# Altium PCB POWER_SUPPLY.PcbDoc (part 3 of 5)
Units mm, origin at the board's own origin, x right, y up, seen from the top; angles counter-clockwise.
Board outline 115 x 115 mm, 2 copper layers (Top Layer, Bottom Layer), stack 1.58 mm thick; 91 components, 48 nets, 207 pads, 26 vias.
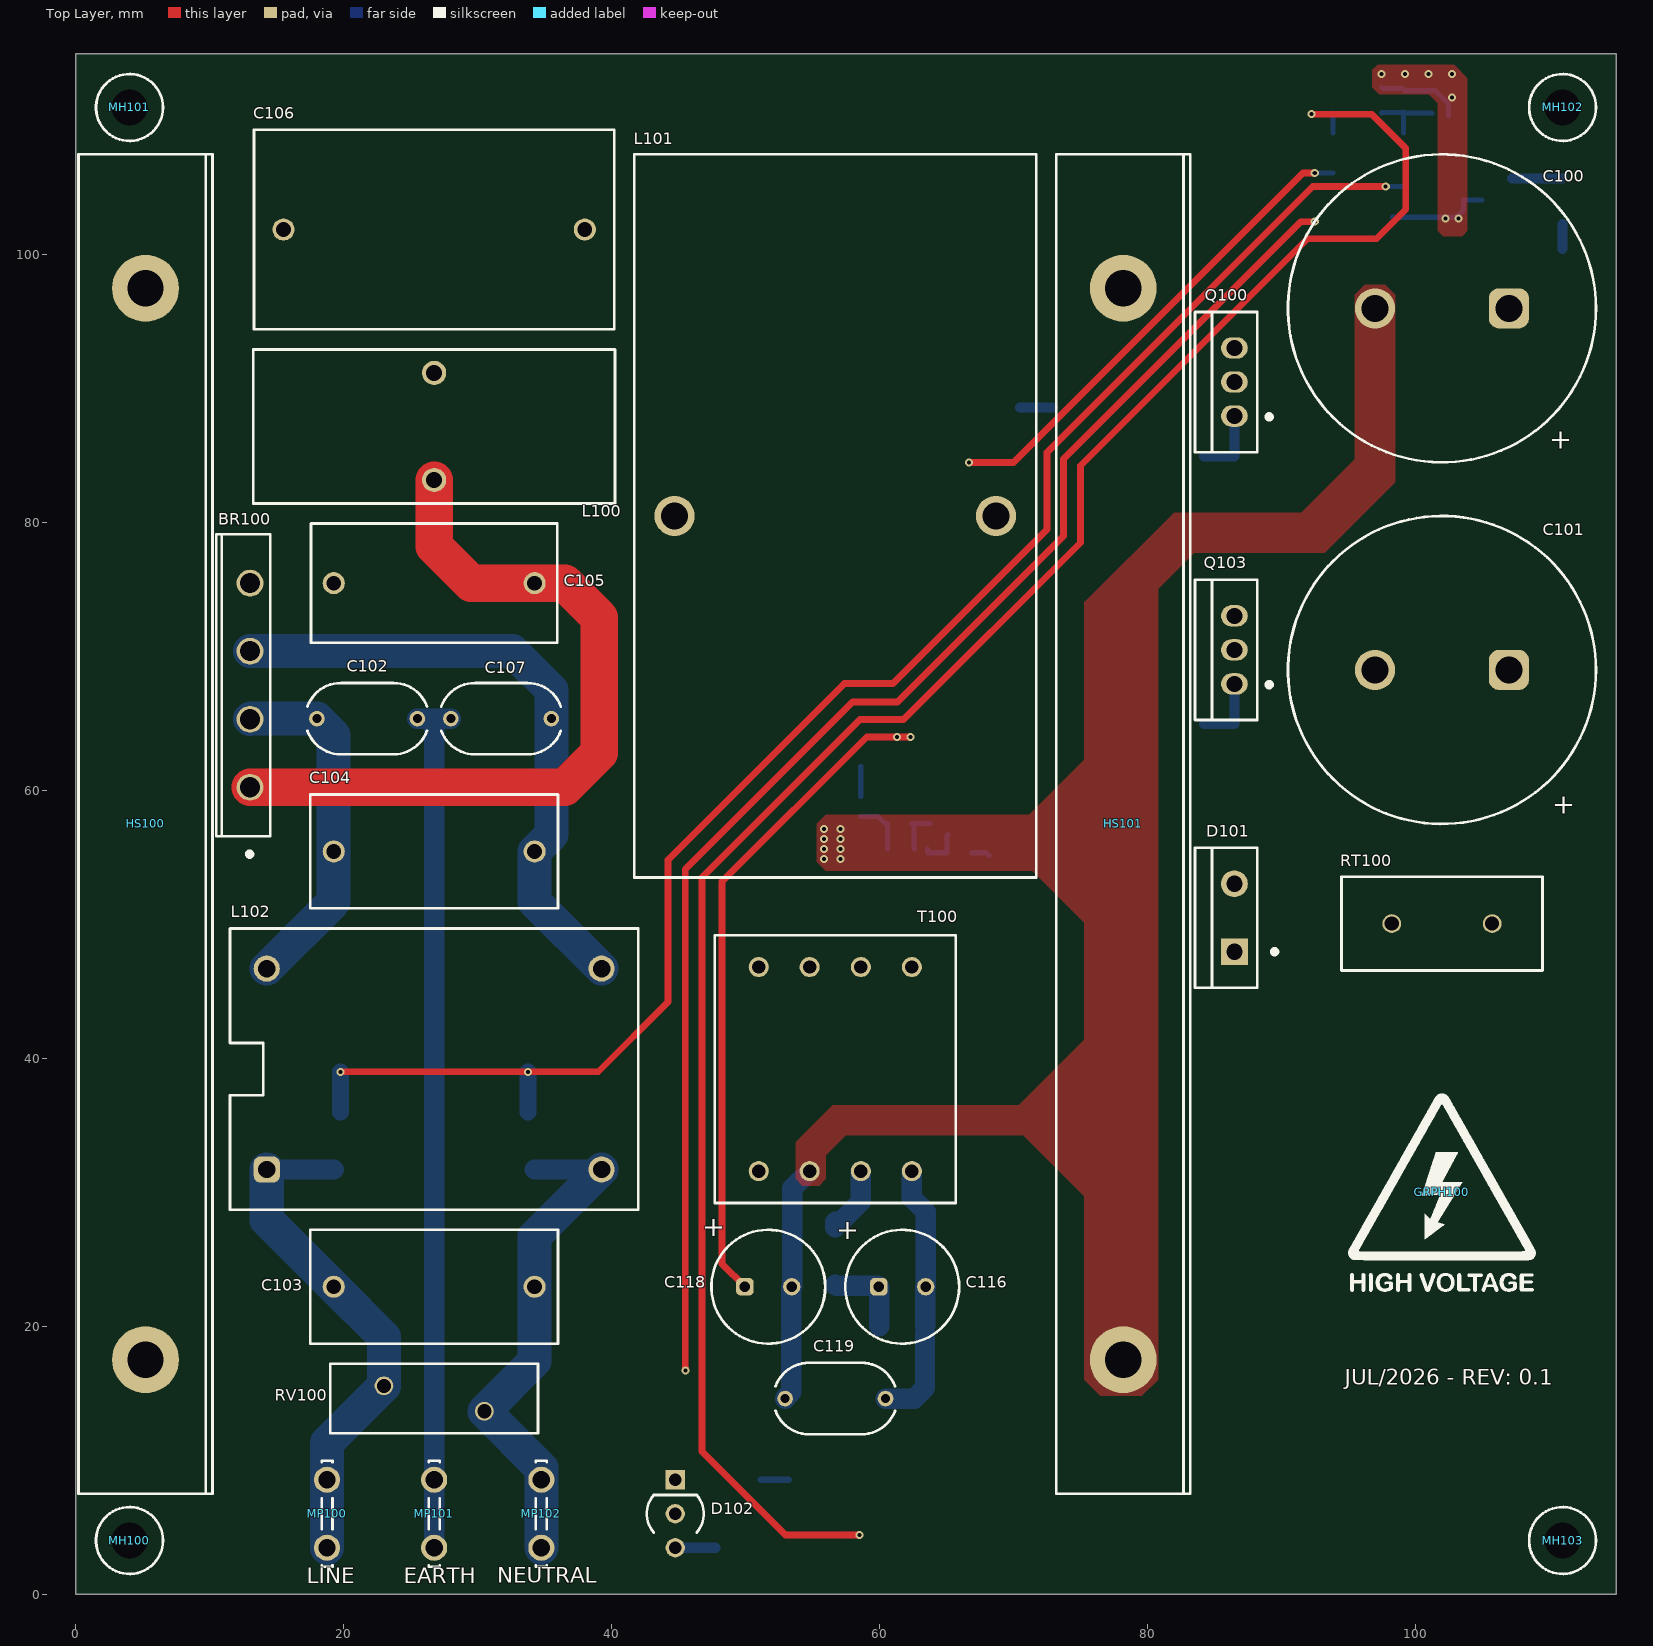
[diagram p0: Top Layer view]

## Part data (continued)
R100 R101 R102: library part RL2512FK-070R18L, "RES 0.18 OHM 1% 1W 2512", Case Code (Imperial)=2512, Case Code (Metric)=6332, Manufacturer="Yageo Group", Max Operating Temperature=155°C, Min Operating Temperature=-55°C, Power Rating=1W, Ratings=AEC-Q200, Supplier Part Number=311-0.18TCT-ND, Temperature Coefficient=600ppm/°C, Tolerance=1%, Working Voltage=424.3mV, Case/Package=2512, Category="Chip SMD Resistors", China RoHS=Non-Compliant, ComponentLink1Description=https://datasheet.octopart.com:443/RL2512FK-070R18L-Yageo-datasheet-182189623.pdf?src-supplier=Newark, ComponentLink1URL=https://datasheet.octopart.com:443/RL2512FK-070R18L-Yageo-datasheet-182189623.pdf?src-supplier=Newark, ComponentLink2Description=https://datasheet.octopart.com:443/RL2512FK-070R18L-Yageo-datasheet-8324393.pdf?src-supplier=Newark, ComponentLink2URL=https://datasheet.octopart.com:443/RL2512FK-070R18L-Yageo-datasheet-8324393.pdf?src-supplier=Newark, ComponentLink3Description=https://datasheet.octopart.com:443/RL2512FK-070R18L-Yageo-datasheet-62330055.pdf?src-supplier=element14+APAC, ComponentLink3URL=https://datasheet.octopart.com:443/RL2512FK-070R18L-Yageo-datasheet-62330055.pdf?src-supplier=element14+APAC, ComponentLink4Description=https://datasheet.octopart.com/RL2512FK-070R18L-Yageo-datasheet-10916029.pdf, ComponentLink4URL=https://datasheet.octopart.com/RL2512FK-070R18L-Yageo-datasheet-10916029.pdf, ComponentLink5Description=https://datasheet.octopart.com:443/RL2512FK-070R18L-Yageo-datasheet-178203169.pdf?src-supplier=Future+Electronics, ComponentLink5URL=https://datasheet.octopart.com:443/RL2512FK-070R18L-Yageo-datasheet-178203169.pdf?src-supplier=Future+Electronics, ComponentLink6Description=https://datasheet.octopart.com:443/RL2512FK-070R18L-Yageo-datasheet-83209227.pdf?src-supplier=Future+Electronics, ComponentLink6URL=https://datasheet.octopart.com:443/RL2512FK-070R18L-Yageo-datasheet-83209227.pdf?src-supplier=Future+Electronics, ComponentLink7Description=https://datasheet.octopart.com:443/RL2512FK-070R18L-Yageo-datasheet-137700928.pdf?src-supplier=Future+Electronics, ComponentLink7URL=https://datasheet.octopart.com:443/RL2512FK-070R18L-Yageo-datasheet-137700928.pdf?src-supplier=Future+Electronics, ComponentLink8Description=https://datasheet.octopart.com:443/RL2512FK-070R18L-Yageo-datasheet-62044473.pdf?src-supplier=Future+Electronics, ComponentLink8URL=https://datasheet.octopart.com:443/RL2512FK-070R18L-Yageo-datasheet-62044473.pdf?src-supplier=Future+Electronics, ComponentLink9Description=https://datasheet.octopart.com:443/RL2512FK-070R18L-Yageo-datasheet-61253474.pdf?src-supplier=Future+Electronics, ComponentLink9URL=https://datasheet.octopart.com:443/RL2512FK-070R18L-Yageo-datasheet-61253474.pdf?src-supplier=Future+Electronics, ComponentLink10Description=https://datasheet.octopart.com:443/RL2512FK-070R18L-Yageo-datasheet-60483056.pdf?src-supplier=Future+Electronics, ComponentLink10URL=https://datasheet.octopart.com:443/RL2512FK-070R18L-Yageo-datasheet-60483056.pdf?src-supplier=Future+Electronics, ComponentLink11Description=http://sigma.octopart.com:80/conflict_mineral_statement/Yageo-company-3.pdf?src-supplier=Compliance+Statements, ComponentLink11URL=http://sigma.octopart.com:80/conflict_mineral_statement/Yageo-company-3.pdf?src-supplier=Compliance+Statements, ComponentLink12Description=http://sigma.octopart.com:80/rohs_statement/Yageo-company-2.pdf?src-supplier=Compliance+Statements, ComponentLink12URL=http://sigma.octopart.com:80/rohs_statement/Yageo-company-2.pdf?src-supplier=Compliance+Statements, Composition="Thick Film", Contact Plating=Tin, Depth=3.2mm, Height=550µm, Lead Free="Lead Free", Length=6.35mm, Lifecycle Status=Production, Manufacturer Part Number=RL2512FK-070R18L, Military Standard=Not, Mounting Technology="Surface Mount", Number of Terminals=2, Packaging="Cut Tape", Pricing="1=0.44, 10=0.249, 25=0.206, 50=0.1814, 100=0.1618, 250=0.142, 500=0.13056, 1000=0.12148 (USD)", Radiation Hardening=No, REACH SVHC=Yes, RoHS=Compliant, Schedule B="8533210045, 8533210045|8533210045, 8533210045|8533210045|8533210045, 8533210045|8533210045|8533210045|8533210045", Stock=7929, Supplier=DigiKey, Termination=SMD/SMT, Weight=40.511469mg, Width=3.2mm
R103 R111: library part RC0805FR-073R92L, "RES 3.92 OHM 1% 1/8W 0805", Case Code (Imperial)=0805, Manufacturer="Yageo Group", Manufacturer Package Identifier="0805 (2012 metric)", Max Operating Temperature=155°C, Max Power Dissipation=125mW, Min Operating Temperature=-55°C, Supplier Part Number=311-3.92CRCT-ND, Temperature Coefficient=200ppm/°C, Tolerance=1%, Voltage Rating=150V, Case/Package=0805, Category="Chip SMD Resistors", China RoHS=Non-Compliant, ComponentLink1Description=https://datasheet.octopart.com:443/RC0805FR-073R92L-Yageo-datasheet-175887523.pdf?src-supplier=IHS, ComponentLink1URL=https://datasheet.octopart.com:443/RC0805FR-073R92L-Yageo-datasheet-175887523.pdf?src-supplier=IHS, ComponentLink2Description=https://datasheet.octopart.com:443/RC0805FR-073R92L-Yageo-datasheet-103092701.pdf?src-supplier=Upverter, ComponentLink2URL=https://datasheet.octopart.com:443/RC0805FR-073R92L-Yageo-datasheet-103092701.pdf?src-supplier=Upverter, ComponentLink3Description=https://datasheet.octopart.com:443/RC0805FR-073R92L-Yageo-Group-datasheet-176638170.pdf?src-supplier=Future+Electronics, ComponentLink3URL=https://datasheet.octopart.com:443/RC0805FR-073R92L-Yageo-Group-datasheet-176638170.pdf?src-supplier=Future+Electronics, ComponentLink4Description=https://datasheet.octopart.com:443/RC0805FR-073R92L-Yageo-datasheet-164759695.pdf?src-supplier=Future+Electronics, ComponentLink4URL=https://datasheet.octopart.com:443/RC0805FR-073R92L-Yageo-datasheet-164759695.pdf?src-supplier=Future+Electronics, ComponentLink5Description=https://datasheet.octopart.com:443/RC0805FR-073R92L-Yageo-datasheet-12592811.pdf?src-supplier=Future+Electronics, ComponentLink5URL=https://datasheet.octopart.com:443/RC0805FR-073R92L-Yageo-datasheet-12592811.pdf?src-supplier=Future+Electronics, ComponentLink6Description=https://datasheet.octopart.com:443/RC0805FR-073R92L-Yageo-datasheet-8330313.pdf?src-supplier=Future+Electronics, ComponentLink6URL=https://datasheet.octopart.com:443/RC0805FR-073R92L-Yageo-datasheet-8330313.pdf?src-supplier=Future+Electronics, ComponentLink7Description=https://datasheet.octopart.com:443/RC0805FR-073R92L-Yageo-datasheet-8324252.pdf?src-supplier=Future+Electronics, ComponentLink7URL=https://datasheet.octopart.com:443/RC0805FR-073R92L-Yageo-datasheet-8324252.pdf?src-supplier=Future+Electronics, ComponentLink8Description=https://datasheet.octopart.com/RC0805FR-073R92L-Yageo-datasheet-73766026.pdf, ComponentLink8URL=https://datasheet.octopart.com/RC0805FR-073R92L-Yageo-datasheet-73766026.pdf, ComponentLink9Description=https://datasheet.octopart.com:443/RC0805FR-073R92L-Yageo-datasheet-118657.pdf?src-supplier=DigiKey, ComponentLink9URL=https://datasheet.octopart.com:443/RC0805FR-073R92L-Yageo-datasheet-118657.pdf?src-supplier=DigiKey, ComponentLink10Description=http://sigma.octopart.com:80/conflict_mineral_statement/Yageo-company-3.pdf?src-supplier=Compliance+Statements, ComponentLink10URL=http://sigma.octopart.com:80/conflict_mineral_statement/Yageo-company-3.pdf?src-supplier=Compliance+Statements, ComponentLink11Description=http://sigma.octopart.com:80/rohs_statement/Yageo-company-2.pdf?src-supplier=Compliance+Statements, ComponentLink11URL=http://sigma.octopart.com:80/rohs_statement/Yageo-company-2.pdf?src-supplier=Compliance+Statements, Composition="Thick Film", Contact Plating=Tin, Depth=1.25mm, Features="Moisture Resistant", Height=500µm, Lead Free="Lead Free", Length=2mm, Lifecycle Status=Production, Manufacturer Part Number=RC0805FR-073R92L, Military Standard=Not, Mounting Technology="Surface Mount", Number of Terminals=2, Number of Terminations=2, Power Dissipation=125mW, Power Rating=125mW, Pricing="1=0.1, 10=0.015, 25=0.0148 (USD)", Radiation Hardening=No, REACH SVHC=Yes, RoHS=Compliant, Schedule B="8533210045, 8533210045|8533210045|8533210045|8533210045|8533210045", Stock=8839, Supplier=DigiKey, Termination=SMD/SMT, Voltage Rating (DC)=150V, Width=1.25mm, Working Voltage=150V
R104 R105: library part RC1206FR-071K33L, "RES 1.33K OHM 1% 1/4W 1206", Case Code (Imperial)=1206, Case Code (Metric)=3216, Manufacturer="Yageo Group", Max Operating Temperature=155°C, Min Operating Temperature=-55°C, Power Rating=250mW, Supplier Part Number=311-1.33KFRCT-ND, Temperature Coefficient=100ppm/°C, Tolerance=1%, Voltage Rating=200V, Case/Package=1206, Category="Chip SMD Resistors", China RoHS=Non-Compliant, ComponentLink1Description=https://datasheet.octopart.com:443/RC1206FR-071K33L-Yageo-datasheet-175887523.pdf?src-supplier=IHS, ComponentLink1URL=https://datasheet.octopart.com:443/RC1206FR-071K33L-Yageo-datasheet-175887523.pdf?src-supplier=IHS, ComponentLink2Description=https://datasheet.octopart.com:443/RC1206FR-071K33L-Yageo-datasheet-103092701.pdf?src-supplier=Upverter, ComponentLink2URL=https://datasheet.octopart.com:443/RC1206FR-071K33L-Yageo-datasheet-103092701.pdf?src-supplier=Upverter, ComponentLink3Description=https://datasheet.octopart.com:443/RC1206FR-071K33L-Yageo-datasheet-176638170.pdf?src-supplier=Future+Electronics, ComponentLink3URL=https://datasheet.octopart.com:443/RC1206FR-071K33L-Yageo-datasheet-176638170.pdf?src-supplier=Future+Electronics, ComponentLink4Description=https://datasheet.octopart.com:443/RC1206FR-071K33L-Yageo-datasheet-8359522.pdf?src-supplier=Future+Electronics, ComponentLink4URL=https://datasheet.octopart.com:443/RC1206FR-071K33L-Yageo-datasheet-8359522.pdf?src-supplier=Future+Electronics, ComponentLink5Description=https://datasheet.octopart.com:443/RC1206FR-071K33L-Yageo-datasheet-164759695.pdf?src-supplier=Future+Electronics, ComponentLink5URL=https://datasheet.octopart.com:443/RC1206FR-071K33L-Yageo-datasheet-164759695.pdf?src-supplier=Future+Electronics, ComponentLink6Description=https://datasheet.octopart.com:443/RC1206FR-071K33L-Yageo-datasheet-137700087.pdf?src-supplier=Future+Electronics, ComponentLink6URL=https://datasheet.octopart.com:443/RC1206FR-071K33L-Yageo-datasheet-137700087.pdf?src-supplier=Future+Electronics, ComponentLink7Description=https://datasheet.octopart.com:443/RC1206FR-071K33L-Yageo-datasheet-27233761.pdf?src-supplier=Future+Electronics, ComponentLink7URL=https://datasheet.octopart.com:443/RC1206FR-071K33L-Yageo-datasheet-27233761.pdf?src-supplier=Future+Electronics, ComponentLink8Description=https://datasheet.octopart.com:443/RC1206FR-071K33L-Yageo-datasheet-13032847.pdf?src-supplier=Future+Electronics, ComponentLink8URL=https://datasheet.octopart.com:443/RC1206FR-071K33L-Yageo-datasheet-13032847.pdf?src-supplier=Future+Electronics, ComponentLink9Description=https://datasheet.octopart.com/RC1206FR-071K33L-Yageo-datasheet-73766026.pdf, ComponentLink9URL=https://datasheet.octopart.com/RC1206FR-071K33L-Yageo-datasheet-73766026.pdf, ComponentLink10Description=https://datasheet.octopart.com:443/RC1206FR-071K33L-Yageo-datasheet-118639.pdf?src-supplier=DigiKey, ComponentLink10URL=https://datasheet.octopart.com:443/RC1206FR-071K33L-Yageo-datasheet-118639.pdf?src-supplier=DigiKey, ComponentLink11Description=http://sigma.octopart.com:80/conflict_mineral_statement/Yageo-company-3.pdf?src-supplier=Compliance+Statements, ComponentLink11URL=http://sigma.octopart.com:80/conflict_mineral_statement/Yageo-company-3.pdf?src-supplier=Compliance+Statements, ComponentLink12Description=http://sigma.octopart.com:80/rohs_statement/Yageo-company-2.pdf?src-supplier=Compliance+Statements, ComponentLink12URL=http://sigma.octopart.com:80/rohs_statement/Yageo-company-2.pdf?src-supplier=Compliance+Statements, Composition="Thick Film", Country of Origin="Mainland China, Taiwan", Depth=1.6mm, Export Control Classification Number (ECCN) Code=EAR99, Harmonized Tariff Schedule (HTS) Code=8533.21.00.30, Height=550µm, Introduction Date=2004-09-22, Lead Free="Lead Free", Length=3.1mm, Lifecycle Status=Production, Manufacturer Part Number=RC1206FR-071K33L, Military Standard=Not, Mounting Technology="Surface Mount", Number of Terminals=2, Packaging="Tape & Reel", Pricing="1=0.1, 10=0.047, 25=0.036, 50=0.0296, 100=0.0247, 250=0.0198, 500=0.01698, 1000=0.01477 (USD)", REACH SVHC=Yes, RoHS=Compliant, Schedule B="8533210045, 8533210045|8533210045, 8533210045|8533210045|8533210045, 8533210045|8533210045|8533210045|8533210045", Stock=40191, Supplier=DigiKey, Termination=SMD/SMT, Voltage Rating (DC)=200V, Width=1.6mm, Working Voltage=200V
R106 R112: library part RC0805FR-0715RL, "RES 15 OHM 1% 1/8W 0805", Case Code (Imperial)=0805, Manufacturer="Yageo Group", Max Operating Temperature=155°C, Max Power Dissipation=125mW, Min Operating Temperature=-55°C, Supplier Part Number=311-15.0CRCT-ND, Temperature Coefficient=100ppm/°C, Tolerance=1%, Voltage Rating=150V, Case/Package=0805, Category="Chip SMD Resistors", China RoHS=Non-Compliant, ComponentLink1Description=https://datasheet.octopart.com:443/RC0805FR-0715RL-Yageo-datasheet-175887523.pdf?src-supplier=Newark, ComponentLink1URL=https://datasheet.octopart.com:443/RC0805FR-0715RL-Yageo-datasheet-175887523.pdf?src-supplier=Newark, ComponentLink2Description=https://datasheet.octopart.com:443/RC0805FR-0715RL-Yageo-datasheet-103092701.pdf?src-supplier=Upverter, ComponentLink2URL=https://datasheet.octopart.com:443/RC0805FR-0715RL-Yageo-datasheet-103092701.pdf?src-supplier=Upverter, ComponentLink3Description=https://datasheet.octopart.com:443/RC0805FR-0715RL-Yageo-Group-datasheet-190305687.pdf?src-supplier=Future+Electronics, ComponentLink3URL=https://datasheet.octopart.com:443/RC0805FR-0715RL-Yageo-Group-datasheet-190305687.pdf?src-supplier=Future+Electronics, ComponentLink4Description=https://datasheet.octopart.com:443/RC0805FR-0715RL-Yageo-datasheet-164759695.pdf?src-supplier=Future+Electronics, ComponentLink4URL=https://datasheet.octopart.com:443/RC0805FR-0715RL-Yageo-datasheet-164759695.pdf?src-supplier=Future+Electronics, ComponentLink5Description=https://datasheet.octopart.com:443/RC0805FR-0715RL-Yageo-datasheet-127823281.pdf?src-supplier=Future+Electronics, ComponentLink5URL=https://datasheet.octopart.com:443/RC0805FR-0715RL-Yageo-datasheet-127823281.pdf?src-supplier=Future+Electronics, ComponentLink6Description=https://datasheet.octopart.com:443/RC0805FR-0715RL-Yageo-datasheet-137700087.pdf?src-supplier=Future+Electronics, ComponentLink6URL=https://datasheet.octopart.com:443/RC0805FR-0715RL-Yageo-datasheet-137700087.pdf?src-supplier=Future+Electronics, ComponentLink7Description=https://datasheet.octopart.com:443/RC0805FR-0715RL-Yageo-datasheet-12592811.pdf?src-supplier=Future+Electronics, ComponentLink7URL=https://datasheet.octopart.com:443/RC0805FR-0715RL-Yageo-datasheet-12592811.pdf?src-supplier=Future+Electronics, ComponentLink8Description=https://datasheet.octopart.com:443/RC0805FR-0715RL-Yageo-datasheet-8324252.pdf?src-supplier=Future+Electronics, ComponentLink8URL=https://datasheet.octopart.com:443/RC0805FR-0715RL-Yageo-datasheet-8324252.pdf?src-supplier=Future+Electronics, ComponentLink9Description=https://datasheet.octopart.com:443/RC0805FR-0715RL-Yageo-datasheet-8330313.pdf?src-supplier=element14+APAC, ComponentLink9URL=https://datasheet.octopart.com:443/RC0805FR-0715RL-Yageo-datasheet-8330313.pdf?src-supplier=element14+APAC, ComponentLink10Description=https://datasheet.octopart.com:443/RC0805FR-0715RL-Yageo-datasheet-62067350.pdf?src-supplier=element14+APAC, ComponentLink10URL=https://datasheet.octopart.com:443/RC0805FR-0715RL-Yageo-datasheet-62067350.pdf?src-supplier=element14+APAC, ComponentLink11Description=https://datasheet.octopart.com:443/RC0805FR-0715RL-Yageo-datasheet-148775077.pdf?src-supplier=TME, ComponentLink11URL=https://datasheet.octopart.com:443/RC0805FR-0715RL-Yageo-datasheet-148775077.pdf?src-supplier=TME, ComponentLink12Description=https://datasheet.octopart.com/RC0805FR-0715RL-Yageo-datasheet-73766026.pdf, ComponentLink12URL=https://datasheet.octopart.com/RC0805FR-0715RL-Yageo-datasheet-73766026.pdf, ComponentLink13Description=https://datasheet.octopart.com:443/RC0805FR-0715RL-Yageo-datasheet-13691069.pdf?src-supplier=Farnell, ComponentLink13URL=https://datasheet.octopart.com:443/RC0805FR-0715RL-Yageo-datasheet-13691069.pdf?src-supplier=Farnell, ComponentLink14Description=https://datasheet.octopart.com:443/RC0805FR-0715RL-Yageo-datasheet-118657.pdf?src-supplier=DigiKey, ComponentLink14URL=https://datasheet.octopart.com:443/RC0805FR-0715RL-Yageo-datasheet-118657.pdf?src-supplier=DigiKey, ComponentLink15Description=http://sigma.octopart.com:80/conflict_mineral_statement/Yageo-company-3.pdf?src-supplier=Compliance+Statements, ComponentLink15URL=http://sigma.octopart.com:80/conflict_mineral_statement/Yageo-company-3.pdf?src-supplier=Compliance+Statements, ComponentLink16Description=http://sigma.octopart.com:80/rohs_statement/Yageo-company-2.pdf?src-supplier=Compliance+Statements, ComponentLink16URL=http://sigma.octopart.com:80/rohs_statement/Yageo-company-2.pdf?src-supplier=Compliance+Statements, Composition="Thick Film", Country of Origin="Mainland China, Taiwan", Depth=1.25mm, Export Control Classification Number (ECCN) Code=EAR99, Features="Moisture Resistant", Harmonized Tariff Schedule (HTS) Code=8533.21.00.30, Height=500µm, Introduction Date=2004-09-22, Lead Free="Lead Free", Length=2mm, Lifecycle Status=Production, Manufacturer Part Number=RC0805FR-0715RL, Military Standard=Not, Mounting Technology="Surface Mount", Number of Terminals=2, Number of Terminations=2, Pins=2, Power Dissipation=125mW, Power Rating=125mW, Pricing="1=0.13, 10=0.010, 25=0.0096, 50=0.0092, 100=0.0083 (USD)", REACH SVHC=Yes, RoHS=Compliant, Schedule B="8533210045, 8533210045|8533210045, 8533210045|8533210045|8533210045, 8533210045|8533210045|8533210045|8533210045", Stock=34767, Supplier=DigiKey, Termination=SMD/SMT, Voltage Rating (AC)=150V, Voltage Rating (DC)=150V, Width=1.25mm, Working Voltage=150V
R107: library part RC1206FR-0759RL, "RES 59 OHM 1% 1/4W 1206", Case Code (Imperial)=1206, Case Code (Metric)=3216, Manufacturer="Yageo Group", Max Operating Temperature=155°C, Max Power Dissipation=250mW, Min Operating Temperature=-55°C, Supplier Part Number=311-59.0FRCT-ND, Temperature Coefficient=100ppm/°C, Tolerance=1%, Voltage Rating=200V, Case/Package=1206, Category="Chip SMD Resistors", China RoHS=Non-Compliant, ComponentLink1Description=https://datasheet.octopart.com:443/RC1206FR-0759RL-Yageo-datasheet-175887523.pdf?src-supplier=IHS, ComponentLink1URL=https://datasheet.octopart.com:443/RC1206FR-0759RL-Yageo-datasheet-175887523.pdf?src-supplier=IHS, ComponentLink2Description=https://datasheet.octopart.com:443/RC1206FR-0759RL-Yageo-datasheet-103092701.pdf?src-supplier=Upverter, ComponentLink2URL=https://datasheet.octopart.com:443/RC1206FR-0759RL-Yageo-datasheet-103092701.pdf?src-supplier=Upverter, ComponentLink3Description=https://datasheet.octopart.com:443/RC1206FR-0759RL-Yageo-Group-datasheet-176638170.pdf?src-supplier=Future+Electronics, ComponentLink3URL=https://datasheet.octopart.com:443/RC1206FR-0759RL-Yageo-Group-datasheet-176638170.pdf?src-supplier=Future+Electronics, ComponentLink4Description=https://datasheet.octopart.com:443/RC1206FR-0759RL-Yageo-datasheet-164759695.pdf?src-supplier=Future+Electronics, ComponentLink4URL=https://datasheet.octopart.com:443/RC1206FR-0759RL-Yageo-datasheet-164759695.pdf?src-supplier=Future+Electronics, ComponentLink5Description=https://datasheet.octopart.com:443/RC1206FR-0759RL-Yageo-datasheet-127823281.pdf?src-supplier=Future+Electronics, ComponentLink5URL=https://datasheet.octopart.com:443/RC1206FR-0759RL-Yageo-datasheet-127823281.pdf?src-supplier=Future+Electronics, ComponentLink6Description=https://datasheet.octopart.com:443/RC1206FR-0759RL-Yageo-datasheet-137700087.pdf?src-supplier=Future+Electronics, ComponentLink6URL=https://datasheet.octopart.com:443/RC1206FR-0759RL-Yageo-datasheet-137700087.pdf?src-supplier=Future+Electronics, ComponentLink7Description=https://datasheet.octopart.com:443/RC1206FR-0759RL-Yageo-datasheet-27233761.pdf?src-supplier=Future+Electronics, ComponentLink7URL=https://datasheet.octopart.com:443/RC1206FR-0759RL-Yageo-datasheet-27233761.pdf?src-supplier=Future+Electronics, ComponentLink8Description=https://datasheet.octopart.com:443/RC1206FR-0759RL-Yageo-datasheet-13032847.pdf?src-supplier=Future+Electronics, ComponentLink8URL=https://datasheet.octopart.com:443/RC1206FR-0759RL-Yageo-datasheet-13032847.pdf?src-supplier=Future+Electronics, ComponentLink9Description=https://datasheet.octopart.com:443/RC1206FR-0759RL-Yageo-datasheet-8359522.pdf?src-supplier=Future+Electronics, ComponentLink9URL=https://datasheet.octopart.com:443/RC1206FR-0759RL-Yageo-datasheet-8359522.pdf?src-supplier=Future+Electronics, ComponentLink10Description=https://datasheet.octopart.com/RC1206FR-0759RL-Yageo-datasheet-73766026.pdf, ComponentLink10URL=https://datasheet.octopart.com/RC1206FR-0759RL-Yageo-datasheet-73766026.pdf, ComponentLink11Description=https://datasheet.octopart.com:443/RC1206FR-0759RL-Yageo-datasheet-118639.pdf?src-supplier=DigiKey, ComponentLink11URL=https://datasheet.octopart.com:443/RC1206FR-0759RL-Yageo-datasheet-118639.pdf?src-supplier=DigiKey, ComponentLink12Description=http://sigma.octopart.com:80/conflict_mineral_statement/Yageo-company-3.pdf?src-supplier=Compliance+Statements, ComponentLink12URL=http://sigma.octopart.com:80/conflict_mineral_statement/Yageo-company-3.pdf?src-supplier=Compliance+Statements, ComponentLink13Description=http://sigma.octopart.com:80/rohs_statement/Yageo-company-2.pdf?src-supplier=Compliance+Statements, ComponentLink13URL=http://sigma.octopart.com:80/rohs_statement/Yageo-company-2.pdf?src-supplier=Compliance+Statements, Composition="Thick Film", Country of Origin="Mainland China, Taiwan", Depth=1.6mm, Export Control Classification Number (ECCN) Code=EAR99, Features="Moisture Resistant", Harmonized Tariff Schedule (HTS) Code=8533.21.00.30, Height=550µm, Introduction Date=2004-09-22, Lead Free="Lead Free", Length=3.1mm, Lifecycle Status=Production, Manufacturer Part Number=RC1206FR-0759RL, Military Standard=Not, Mounting Technology="Surface Mount", Number of Terminals=2, Number of Terminations=2, Power Rating=250mW, Pricing="1=0.1, 10=0.047, 25=0.036, 50=0.0296, 100=0.0247, 250=0.0198, 500=0.01698, 1000=0.01477 (USD)", REACH SVHC=Yes, RoHS=Compliant, Schedule B="8533210045, 8533210045|8533210045|8533210045|8533210045|8533210045", Stock=29541, Supplier=DigiKey, Termination=SMD/SMT, Voltage Rating (DC)=200V, Width=1.6mm, Working Voltage=200V
R108 R113: library part RC0805FR-0710KL, "RES 10K OHM 1% 1/8W 0805", Case Code (Imperial)=0805, Manufacturer="Yageo Group", Max Operating Temperature=155°C, Max Power Dissipation=125mW, Min Operating Temperature=-55°C, Supplier Part Number=311-10.0KCRCT-ND, Temperature Coefficient=100ppm/°C, Tolerance=1%, Voltage Rating=150V, Case/Package=0805, Category="Chip SMD Resistors", China RoHS=Non-Compliant, ComponentLink1Description=https://datasheet.octopart.com:443/RC0805FR-0710KL-Yageo-datasheet-175887523.pdf?src-supplier=Newark, ComponentLink1URL=https://datasheet.octopart.com:443/RC0805FR-0710KL-Yageo-datasheet-175887523.pdf?src-supplier=Newark, ComponentLink2Description=https://datasheet.octopart.com:443/RC0805FR-0710KL-Yageo-datasheet-62067350.pdf?src-supplier=Farnell, ComponentLink2URL=https://datasheet.octopart.com:443/RC0805FR-0710KL-Yageo-datasheet-62067350.pdf?src-supplier=Farnell, ComponentLink3Description=https://datasheet.octopart.com:443/RC0805FR-0710KL-Yageo-datasheet-13691069.pdf?src-supplier=Farnell, ComponentLink3URL=https://datasheet.octopart.com:443/RC0805FR-0710KL-Yageo-datasheet-13691069.pdf?src-supplier=Farnell, ComponentLink4Description=https://datasheet.octopart.com:443/RC0805FR-0710KL-Yageo-datasheet-103092701.pdf?src-supplier=Upverter, ComponentLink4URL=https://datasheet.octopart.com:443/RC0805FR-0710KL-Yageo-datasheet-103092701.pdf?src-supplier=Upverter, ComponentLink5Description=https://datasheet.octopart.com:443/RC0805FR-0710KL-Yageo-datasheet-98239111.pdf?src-supplier=Upverter, ComponentLink5URL=https://datasheet.octopart.com:443/RC0805FR-0710KL-Yageo-datasheet-98239111.pdf?src-supplier=Upverter, ComponentLink6Description=https://datasheet.octopart.com:443/RC0805FR-0710KL-Yageo---Phycomp-datasheet-67302840.pdf?src-supplier=Upverter, ComponentLink6URL=https://datasheet.octopart.com:443/RC0805FR-0710KL-Yageo---Phycomp-datasheet-67302840.pdf?src-supplier=Upverter, ComponentLink7Description=https://datasheet.octopart.com:443/RC0805FR-0710KL-Yageo-datasheet-8330313.pdf?src-supplier=element14+APAC, ComponentLink7URL=https://datasheet.octopart.com:443/RC0805FR-0710KL-Yageo-datasheet-8330313.pdf?src-supplier=element14+APAC, ComponentLink8Description=https://datasheet.octopart.com:443/RC0805FR-0710KL-Yageo-datasheet-12592811.pdf?src-supplier=element14+APAC, ComponentLink8URL=https://datasheet.octopart.com:443/RC0805FR-0710KL-Yageo-datasheet-12592811.pdf?src-supplier=element14+APAC, ComponentLink9Description=https://datasheet.octopart.com:443/RC0805FR-0710KL-Yageo-Group-datasheet-190305687.pdf?src-supplier=Future+Electronics, ComponentLink9URL=https://datasheet.octopart.com:443/RC0805FR-0710KL-Yageo-Group-datasheet-190305687.pdf?src-supplier=Future+Electronics, ComponentLink10Description=https://datasheet.octopart.com:443/RC0805FR-0710KL-Yageo-datasheet-164759695.pdf?src-supplier=Future+Electronics, ComponentLink10URL=https://datasheet.octopart.com:443/RC0805FR-0710KL-Yageo-datasheet-164759695.pdf?src-supplier=Future+Electronics, ComponentLink11Description=https://datasheet.octopart.com:443/RC0805FR-0710KL-Yageo-datasheet-15800360.pdf?src-supplier=Future+Electronics, ComponentLink11URL=https://datasheet.octopart.com:443/RC0805FR-0710KL-Yageo-datasheet-15800360.pdf?src-supplier=Future+Electronics, ComponentLink12Description=https://datasheet.octopart.com:443/RC0805FR-0710KL-Yageo-datasheet-8324252.pdf?src-supplier=Future+Electronics, ComponentLink12URL=https://datasheet.octopart.com:443/RC0805FR-0710KL-Yageo-datasheet-8324252.pdf?src-supplier=Future+Electronics, ComponentLink13Description=https://datasheet.octopart.com:443/RC0805FR-0710KL-Yageo-datasheet-79472498.pdf?src-supplier=Megastar, ComponentLink13URL=https://datasheet.octopart.com:443/RC0805FR-0710KL-Yageo-datasheet-79472498.pdf?src-supplier=Megastar, ComponentLink14Description=https://datasheet.octopart.com:443/RC0805FR-0710KL-Yageo-datasheet-27714392.pdf?src-supplier=Seeed+Studio, ComponentLink14URL=https://datasheet.octopart.com:443/RC0805FR-0710KL-Yageo-datasheet-27714392.pdf?src-supplier=Seeed+Studio, ComponentLink15Description=https://datasheet.octopart.com/RC0805FR-0710KL-Yageo-datasheet-73766026.pdf, ComponentLink15URL=https://datasheet.octopart.com/RC0805FR-0710KL-Yageo-datasheet-73766026.pdf, ComponentLink16Description=https://datasheet.octopart.com:443/RC0805FR-0710KL-Yageo-datasheet-118657.pdf?src-supplier=DigiKey, ComponentLink16URL=https://datasheet.octopart.com:443/RC0805FR-0710KL-Yageo-datasheet-118657.pdf?src-supplier=DigiKey, ComponentLink17Description=https://datasheet.octopart.com:443/RC0805FR-0710KL-Yageo-datasheet-502840.pdf?src-supplier=element14, ComponentLink17URL=https://datasheet.octopart.com:443/RC0805FR-0710KL-Yageo-datasheet-502840.pdf?src-supplier=element14, ComponentLink18Description=http://sigma.octopart.com:80/conflict_mineral_statement/Yageo-company-3.pdf?src-supplier=Compliance+Statements, ComponentLink18URL=http://sigma.octopart.com:80/conflict_mineral_statement/Yageo-company-3.pdf?src-supplier=Compliance+Statements, ComponentLink19Description=http://sigma.octopart.com:80/rohs_statement/Yageo-company-2.pdf?src-supplier=Compliance+Statements, ComponentLink19URL=http://sigma.octopart.com:80/rohs_statement/Yageo-company-2.pdf?src-supplier=Compliance+Statements, Composition="Thick Film", Country of Origin="Mainland China, Taiwan", Depth=1.25mm, Export Control Classification Number (ECCN) Code=EAR99, Features="Moisture Resistant", Harmonized Tariff Schedule (HTS) Code=8533.21.00.30, Height=500µm, Introduction Date=2004-09-22, Lead Free="Lead Free", Length=2mm, Lifecycle Status=Production, Manufacturer Part Number=RC0805FR-0710KL, Military Standard=Not, Mounting Technology="Surface Mount", Number of Terminals=2, Number of Terminations=2, Packaging="Tape and Reel", Pins=2, Power Dissipation=125mW, Power Rating=125mW, Pricing="1=0.13, 10=0.009, 25=0.0088, 50=0.0082 (USD)", REACH SVHC=Yes, RoHS=Compliant, Schedule B="8533210045, 8533210045|8533210045|8533210045|8533210045|8533210045|8533210045|8533210045|8533210045|8533210045|8533210045|8533210045|8533210045|8533210045|8533210045|8533210045|8533210045|8533210045|8533210045|8533210045|8533210045|8533210045|8533210045|8533210045|85", Stock=2846345, Supplier=DigiKey, Termination=SMD/SMT, Voltage Rating (AC)=150V, Width=1.25mm, Working Voltage=150V
R109 R110: library part RC0603FR-0717K8L, "RES 17.8K OHM 1% 1/10W 0603", Case Code (Imperial)=0603, Case Code (Metric)=1608, Manufacturer="Yageo Group", Max Operating Temperature=155°C, Max Power Dissipation=100mW, Min Operating Temperature=-55°C, Supplier Part Number=311-17.8KHRCT-ND, Temperature Coefficient=±200ppm/°C, Tolerance=1%, Voltage Rating=75V, Voltage Rating (AC)=50V, Case/Package=0603, Category="Chip SMD Resistors", China RoHS=Non-Compliant, Component Link Description=https://www.yageogroup.com/content/datasheet/asset/file/PYU-RC_GROUP_51_ROHS_L, Component Link URL=https://www.yageogroup.com/content/datasheet/asset/file/PYU-RC_GROUP_51_ROHS_L, Composition="Thick Film", Contact Plating=Tin, Datasheet=https://www.yageogroup.com/content/datasheet/asset/file/PYU-RC_GROUP_51_ROHS_L, Depth=800µm, Features="Moisture Resistant", Height=450µm, Lead Free="Lead Free", Length=1.6mm, Lifecycle Status=Production, Manufacturer Part Number=RC0603FR-0717K8L, Military Standard=Not, Mounting Technology="Surface Mount", Number of Terminals=2, Number of Terminations=2, Packaging="Tape & Reel", Power Dissipation=100mW, Power Rating=100mW, Radiation Hardening=No, REACH SVHC=Yes, RoHS=Compliant, Supplier=DigiKey, Termination=SMD/SMT, Voltage Rating (DC)=50V, Weight=2.012816mg, Width=800µm, Working Voltage=75V
R114: library part RC0603FR-07332KL, "RES 332K OHM 1% 1/10W 0603", Case Code (Imperial)=0603, Case Code (Metric)=1608, Manufacturer="Yageo Group", Max Operating Temperature=155°C, Max Power Dissipation=100mW, Min Operating Temperature=-55°C, Supplier Part Number=311-332KHRCT-ND, Temperature Coefficient=±200ppm/°C, Tolerance=1%, Voltage Rating=75V, Voltage Rating (AC)=50V, Case/Package=0603, Category="Chip SMD Resistors", China RoHS=Non-Compliant, Component Link Description=https://www.yageogroup.com/content/datasheet/asset/file/PYU-RC_GROUP_51_ROHS_L, Component Link URL=https://www.yageogroup.com/content/datasheet/asset/file/PYU-RC_GROUP_51_ROHS_L, Composition="Thick Film", Contact Plating=Tin, Datasheet=https://www.yageogroup.com/content/datasheet/asset/file/PYU-RC_GROUP_51_ROHS_L, Depth=800µm, Features="Moisture Resistant", Height=450µm, Lead Free="Lead Free", Length=1.6mm, Lifecycle Status=Production, Manufacturer Part Number=RC0603FR-07332KL, Military Standard=Not, Mounting Technology="Surface Mount", Number of Terminals=2, Number of Terminations=2, Packaging="Tape & Reel", Power Dissipation=100mW, Power Rating=100mW, Radiation Hardening=No, REACH SVHC=Yes, RoHS=Compliant, Supplier=DigiKey, Termination=SMD/SMT, Voltage Rating (DC)=50V, Weight=2.012816mg, Width=800µm, Working Voltage=75V
R115 R116 R117: library part RC1206FR-072M21L, "RES 2.21M OHM 1% 1/4W 1206", Case Code (Imperial)=1206, Case Code (Metric)=3216, Manufacturer="Yageo Group", Max Operating Temperature=155°C, Max Power Dissipation=250mW, Min Operating Temperature=-55°C, Supplier Part Number=311-2.21MFRCT-ND, Temperature Coefficient=100ppm/°C, Tolerance=1%, Voltage Rating=200V, Case/Package=1206, Category="Chip SMD Resistors", China RoHS=Non-Compliant, ComponentLink1Description=https://datasheet.octopart.com:443/RC1206FR-072M21L-Yageo-datasheet-175887523.pdf?src-supplier=IHS, ComponentLink1URL=https://datasheet.octopart.com:443/RC1206FR-072M21L-Yageo-datasheet-175887523.pdf?src-supplier=IHS, ComponentLink2Description=https://datasheet.octopart.com:443/RC1206FR-072M21L-Yageo-datasheet-103092701.pdf?src-supplier=Upverter, ComponentLink2URL=https://datasheet.octopart.com:443/RC1206FR-072M21L-Yageo-datasheet-103092701.pdf?src-supplier=Upverter, ComponentLink3Description=https://datasheet.octopart.com:443/RC1206FR-072M21L-Yageo-Group-datasheet-176638170.pdf?src-supplier=Future+Electronics, ComponentLink3URL=https://datasheet.octopart.com:443/RC1206FR-072M21L-Yageo-Group-datasheet-176638170.pdf?src-supplier=Future+Electronics, ComponentLink4Description=https://datasheet.octopart.com:443/RC1206FR-072M21L-Yageo-datasheet-164759695.pdf?src-supplier=Future+Electronics, ComponentLink4URL=https://datasheet.octopart.com:443/RC1206FR-072M21L-Yageo-datasheet-164759695.pdf?src-supplier=Future+Electronics, ComponentLink5Description=https://datasheet.octopart.com:443/RC1206FR-072M21L-Yageo-datasheet-137700087.pdf?src-supplier=Future+Electronics, ComponentLink5URL=https://datasheet.octopart.com:443/RC1206FR-072M21L-Yageo-datasheet-137700087.pdf?src-supplier=Future+Electronics, ComponentLink6Description=https://datasheet.octopart.com:443/RC1206FR-072M21L-Yageo-datasheet-27233761.pdf?src-supplier=Future+Electronics, ComponentLink6URL=https://datasheet.octopart.com:443/RC1206FR-072M21L-Yageo-datasheet-27233761.pdf?src-supplier=Future+Electronics, ComponentLink7Description=https://datasheet.octopart.com:443/RC1206FR-072M21L-Yageo-datasheet-13032847.pdf?src-supplier=Future+Electronics, ComponentLink7URL=https://datasheet.octopart.com:443/RC1206FR-072M21L-Yageo-datasheet-13032847.pdf?src-supplier=Future+Electronics, ComponentLink8Description=https://datasheet.octopart.com:443/RC1206FR-072M21L-Yageo-datasheet-8359522.pdf?src-supplier=Future+Electronics, ComponentLink8URL=https://datasheet.octopart.com:443/RC1206FR-072M21L-Yageo-datasheet-8359522.pdf?src-supplier=Future+Electronics, ComponentLink9Description=https://datasheet.octopart.com/RC1206FR-072M21L-Yageo-datasheet-73766026.pdf, ComponentLink9URL=https://datasheet.octopart.com/RC1206FR-072M21L-Yageo-datasheet-73766026.pdf, ComponentLink10Description=https://datasheet.octopart.com:443/RC1206FR-072M21L-Yageo-datasheet-118639.pdf?src-supplier=DigiKey, ComponentLink10URL=https://datasheet.octopart.com:443/RC1206FR-072M21L-Yageo-datasheet-118639.pdf?src-supplier=DigiKey, ComponentLink11Description=http://sigma.octopart.com:80/conflict_mineral_statement/Yageo-company-3.pdf?src-supplier=Compliance+Statements, ComponentLink11URL=http://sigma.octopart.com:80/conflict_mineral_statement/Yageo-company-3.pdf?src-supplier=Compliance+Statements, ComponentLink12Description=http://sigma.octopart.com:80/rohs_statement/Yageo-company-2.pdf?src-supplier=Compliance+Statements, ComponentLink12URL=http://sigma.octopart.com:80/rohs_statement/Yageo-company-2.pdf?src-supplier=Compliance+Statements, Composition="Thick Film", Contact Plating="Lead, Tin", Country of Origin="Mainland China, Taiwan", Depth=1.6mm, Export Control Classification Number (ECCN) Code=EAR99, Features="Moisture Resistant", Harmonized Tariff Schedule (HTS) Code=8533.21.00.30, Height=550µm, Introduction Date=2004-09-22, Lead Free="Lead Free", Length=3.1mm, Lifecycle Status=Production, Manufacturer Part Number=RC1206FR-072M21L, Military Standard=Not, Mounting Technology="Surface Mount", Number of Terminals=2, Number of Terminations=2, Power Dissipation=250mW, Power Rating=250mW, Pricing="1=0.1, 10=0.011 (USD)", Radiation Hardening=No, REACH SVHC=Yes, RoHS=Compliant, Schedule B="8533210045, 8533210045|8533210045, 8533210045|8533210045|8533210045, 8533210045|8533210045|8533210045|8533210045", Stock=1155, Supplier=DigiKey, Termination=SMD/SMT, Voltage Rating (DC)=200V, Width=1.6mm, Working Voltage=200V
R118: library part RC0603FR-0715K4L, "RES 15.4K OHM 1% 1/10W 0603", Case Code (Imperial)=0603, Case Code (Metric)=1608, Manufacturer="Yageo Group", Max Operating Temperature=155°C, Max Power Dissipation=100mW, Min Operating Temperature=-55°C, Supplier Part Number=311-15.4KHRCT-ND, Temperature Coefficient=±200ppm/°C, Tolerance=1%, Voltage Rating=75V, Voltage Rating (AC)=50V, Case/Package=0603, Category="Chip SMD Resistors", China RoHS=Non-Compliant, Component Link Description=https://www.yageogroup.com/content/datasheet/asset/file/PYU-RC_GROUP_51_ROHS_L, Component Link URL=https://www.yageogroup.com/content/datasheet/asset/file/PYU-RC_GROUP_51_ROHS_L, Composition="Thick Film", Contact Plating=Tin, Datasheet=https://www.yageogroup.com/content/datasheet/asset/file/PYU-RC_GROUP_51_ROHS_L, Depth=800µm, Features="Moisture Resistant", Height=450µm, Lead Free="Lead Free", Length=1.6mm, Lifecycle Status=Production, Manufacturer Part Number=RC0603FR-0715K4L, Military Standard=Not, Mounting Technology="Surface Mount", Number of Terminals=2, Number of Terminations=2, Packaging="Tape & Reel", Power Dissipation=100mW, Power Rating=100mW, Radiation Hardening=No, REACH SVHC=Yes, RoHS=Compliant, Supplier=DigiKey, Termination=SMD/SMT, Voltage Rating (DC)=50V, Weight=2.012816mg, Width=800µm, Working Voltage=75V
R119 R129: library part RC0603FR-0726K1L, "RES 26.1K OHM 1% 1/10W 0603", Case Code (Imperial)=0603, Case Code (Metric)=1608, Manufacturer="Yageo Group", Max Operating Temperature=155°C, Max Power Dissipation=100mW, Min Operating Temperature=-55°C, Supplier Part Number=311-26.1KHRCT-ND, Temperature Coefficient=±200ppm/°C, Tolerance=1%, Voltage Rating=75V, Voltage Rating (AC)=50V, Case/Package=0603, Category="Chip SMD Resistors", China RoHS=Non-Compliant, Component Link Description=https://www.yageogroup.com/content/datasheet/asset/file/PYU-RC_GROUP_51_ROHS_L, Component Link URL=https://www.yageogroup.com/content/datasheet/asset/file/PYU-RC_GROUP_51_ROHS_L, Composition="Thick Film", Contact Plating=Tin, Datasheet=https://www.yageogroup.com/content/datasheet/asset/file/PYU-RC_GROUP_51_ROHS_L, Depth=800µm, Features="Moisture Resistant", Height=450µm, Lead Free="Lead Free", Length=1.6mm, Lifecycle Status=Production, Manufacturer Part Number=RC0603FR-0726K1L, Military Standard=Not, Mounting Technology="Surface Mount", Number of Terminals=2, Number of Terminations=2, Packaging="Tape & Reel", Power Dissipation=100mW, Power Rating=100mW, Radiation Hardening=No, REACH SVHC=Yes, RoHS=Compliant, Supplier=DigiKey, Termination=SMD/SMT, Voltage Rating (DC)=50V, Weight=2.012816mg, Width=800µm, Working Voltage=75V
R120 R130: library part RC0603FR-0756K2L, "RES 56.2K OHM 1% 1/10W 0603", Case Code (Imperial)=0603, Case Code (Metric)=1608, Manufacturer="Yageo Group", Max Operating Temperature=155°C, Max Power Dissipation=100mW, Min Operating Temperature=-55°C, Supplier Part Number=311-56.2KHRCT-ND, Temperature Coefficient=±200ppm/°C, Tolerance=1%, Voltage Rating=75V, Voltage Rating (AC)=50V, Case/Package=0603, Category="Chip SMD Resistors", China RoHS=Non-Compliant, Component Link Description=https://www.yageogroup.com/content/datasheet/asset/file/PYU-RC_GROUP_51_ROHS_L, Component Link URL=https://www.yageogroup.com/content/datasheet/asset/file/PYU-RC_GROUP_51_ROHS_L, Composition="Thick Film", Contact Plating=Tin, Datasheet=https://www.yageogroup.com/content/datasheet/asset/file/PYU-RC_GROUP_51_ROHS_L, Depth=800µm, Features="Moisture Resistant", Height=450µm, Lead Free="Lead Free", Length=1.6mm, Lifecycle Status=Production, Manufacturer Part Number=RC0603FR-0756K2L, Military Standard=Not, Mounting Technology="Surface Mount", Number of Terminals=2, Number of Terminations=2, Packaging="Tape & Reel", Power Dissipation=100mW, Power Rating=100mW, Radiation Hardening=No, REACH SVHC=Yes, RoHS=Compliant, Supplier=DigiKey, Termination=SMD/SMT, Voltage Rating (DC)=50V, Weight=2.012816mg, Width=800µm, Working Voltage=75V